# EAGLE board JDM2_2-Voltage_New2 (EAGLE 7.2.0)
JDM2 with selectable Dual-Voltage
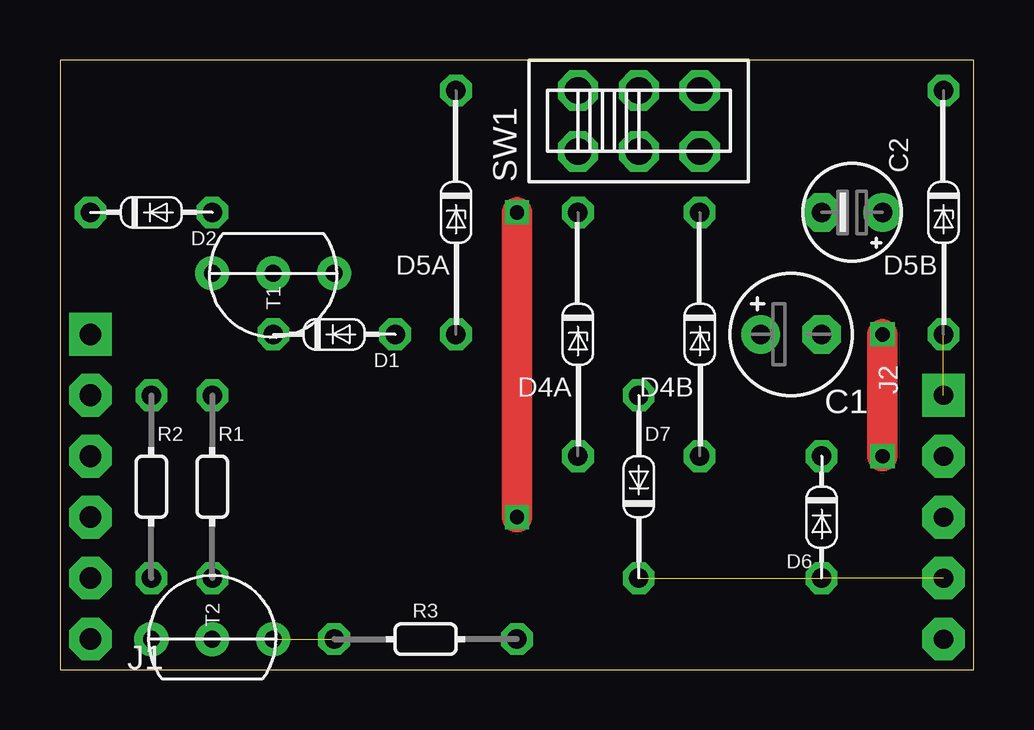
[diagram p0: board, top side]
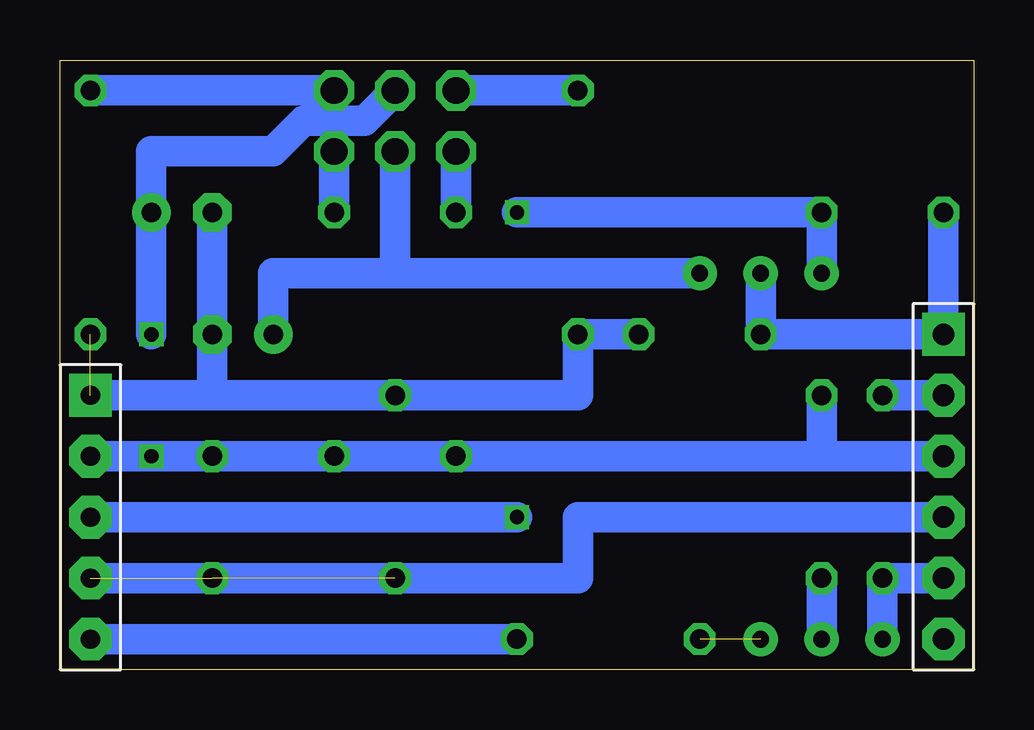
[diagram p1: board, bottom side, seen from below]

Size 38.1 x 25.4 mm. Coordinates in mm from the lower left corner, seen from the top.
Outline: 0,0 38.1,0 38.1,25.4 0,25.4 0,0
Copper layers (1*16): Top 0.035mm / dielectric 1.5mm / Bottom 0.035mm
Design rules "default": minimum track width 10mil, minimum drill 24mil, track to track 8mil, track to pad 8mil, pad to pad 8mil, via to via 8mil, smd to smd 8mil, copper to edge 40mil, drill to drill 8mil, minimum pad ring 10mil, minimum via ring 8mil, stop-mask expansion 4mil, vias tented up to drill 0mil, thermal gap 10mil
Net classes: 0 default: width 0.559 mm; 1 power: width 0.559 mm

## Footprints (pad centres in the part's own frame; a part is rotated, then mirrored left to right if it is on the bottom)
E2,5-5 = drill 0.813 pad 1.6: + 1.27,0 | drill 0.813 pad 1.6 octagon: - -1.27,0
E2,5-4 = drill 0.813 pad 1.6: + 0,1.27 | drill 0.813 pad 1.6 octagon: - 0,-1.27
DO34-5 = drill 0.813 octagon: A 2.54,0; C -2.54,0
DO34Z10V = drill 0.813 octagon: A 0,5.08; C 0,-5.08
DO34-5V = drill 0.813 octagon: A 0,2.54; C 0,-2.54
DO34-7V = drill 0.813 octagon: A 0,3.81; C 0,-3.81
RS232-6PIN = drill 0.9 pad 1.778 square: 1 0,0 | drill 0.9 pad 1.778 octagon: 2 0,2.54; 3 0,5.08; 4 0,7.62; 5 0,10.16; 6 0,12.7
PIC-ICSP = drill 0.8 pad 1.778 square: 1 0,0 | drill 0.8 pad 1.778 octagon: 2 2.54,0; 3 5.08,0; 4 7.62,0; 5 10.16,0
0202/7-V = drill 0.813 octagon: 1 0,-3.81; 2 0,3.81
0202/7 = drill 0.813 octagon: 1 -3.81,0; 2 3.81,0
SLSW-2P2T = drill 1.118 pad 1.524 octagon: 1 1.27,-2.54; 2 1.27,0; 3 1.27,2.54; 4 -1.27,-2.54; 5 -1.27,0; 6 -1.27,2.54
TO92-CBE = drill 0.7 pad 1.422: B 0,0; C 0,2.54; E 0,-2.54

## Placement (x,y rotation side)
C1  100μF  [E2,5-5]  30.48,13.97 180 top
C2  22μF  [E2,5-4]  33.02,19.05 270 top
D1  1N4148  [DO34-5]  11.43,13.97 0 top
D2  1N4148  [DO34-5]  3.81,19.05 0 top
D4A  Z=5.1V  [DO34Z10V]  21.59,13.97 180 top
D4B  Z=8.1V  [DO34Z10V]  26.67,13.97 180 top
D5A  Z=3.3V  [DO34Z10V]  16.51,19.05 180 top
D5B  Z=5.1V  [DO34Z10V]  36.83,19.05 180 top
D6  1N4148  [DO34-5V]  31.75,6.35 180 top
D7  1N4148  [DO34-7V]  24.13,7.62 0 top
J1  COMPORT-6PIN  [RS232-6PIN]  1.27,13.97 180 top
J2  PIC-ICSPICSP  [PIC-ICSP]  36.83,11.43 270 top
R1  10kΩ  [0202/7-V]  6.35,7.62 0 top
R2  1.5kΩ  [0202/7-V]  3.81,7.62 0 top
R3  100Ω  [0202/7]  15.24,1.27 180 top
SW1  SL-SW-2P-2T  [SLSW-2P2T]  24.13,22.86 270 top
T1  BC547  [TO92-CBE]  8.89,16.51 270 top
T2  BC547  [TO92-CBE]  6.35,1.27 90 top

## Library data of the parts
C1 C2 = c
D1 D2 D4A D4B D5A D5B D6 D7 = d
J1 J2 = pinconn
R1-R3 = r
SW1 = sw
T1 T2 = t

## Nets
/MCLR: D2.A J2.3 T1.E
CLK: D6.A D7.C J1.4 J2.4
CTS: J1.5 R2.1 T2.C
DATA: R3.2 T2.E
GND: C1.- C2.- D1.A D5A.A D5B.A D7.A J2.1
N$1: R1.1 T2.B
N$3: D5A.C SW1.4
N$4: D4B.C SW1.3
N$5: C1.+ SW1.2 T1.C
N$6: D5B.C SW1.6
N$7: J1.2 R2.2
PGD: J2.5 R3.1
TXD: D1.C D2.C J1.1 T1.B
VCC: C2.+ D4A.A D4B.A D6.C J1.3 J2.2 R1.2 SW1.5
VPP: D4A.C SW1.1

## Tracks (layer width: path | path; a pad name or v marks a point on that pad's centre or on a via)
/MCLR  (via drill 0.6)
  Top 1.27: v19.05,6.35 v19.05,19.05
  Bottom 1.27: J2.3 v19.05,6.35 | v19.05,19.05 D2.A T1.E
CLK  (2 unrouted)
  Bottom 1.27: J1.4 16.51,6.35 16.51,3.81 J2.4
CTS
  Bottom 1.27: T2.C R2.1 J1.5
DATA  (1 unrouted)
GND  (1 unrouted)
  Bottom 1.27: C2.- C1.- 31.75,11.43 | 31.75,11.43 D7.A 16.51,11.43 D5A.A D1.A | 31.75,11.43 J2.1
N$1
  Bottom 1.27: T2.B R1.1
N$3
  Bottom 1.27: SW1.4 D5A.C
N$4
  Bottom 1.27: D4B.C SW1.3
N$5  (via drill 0.6)
  Bottom 1.27: SW1.2 24.13,16.51 | C1.+ 29.21,16.51 24.13,16.51 | 24.13,16.51 T1.C
  other vias: 11.43,16.51
N$6
  Bottom 1.27: SW1.6 D5B.C
N$7
  Bottom 1.27: J1.2 R2.2
PGD
  Bottom 1.27: J2.5 R3.1
TXD
  Bottom 1.27: 1.27,16.51 J1.1 | J1.1 D1.C T1.B | D2.C J1.1
VCC  (via drill 0.6)
  Top 1.27: v34.29,8.89 v34.29,13.97
  Bottom 1.27: SW1.5 25.4,22.86 27.94,22.86 29.21,21.59 34.29,21.59 C2.+ v34.29,13.97 | J2.2 v34.29,8.89 D6.C D4B.A D4A.A 6.35,8.89 | R1.2 6.35,8.89 | 6.35,8.89 J1.3
VPP
  Bottom 1.27: SW1.1 D4A.C